# EAGLE board LED_Switch_Circuit (EAGLE 8.1.0)
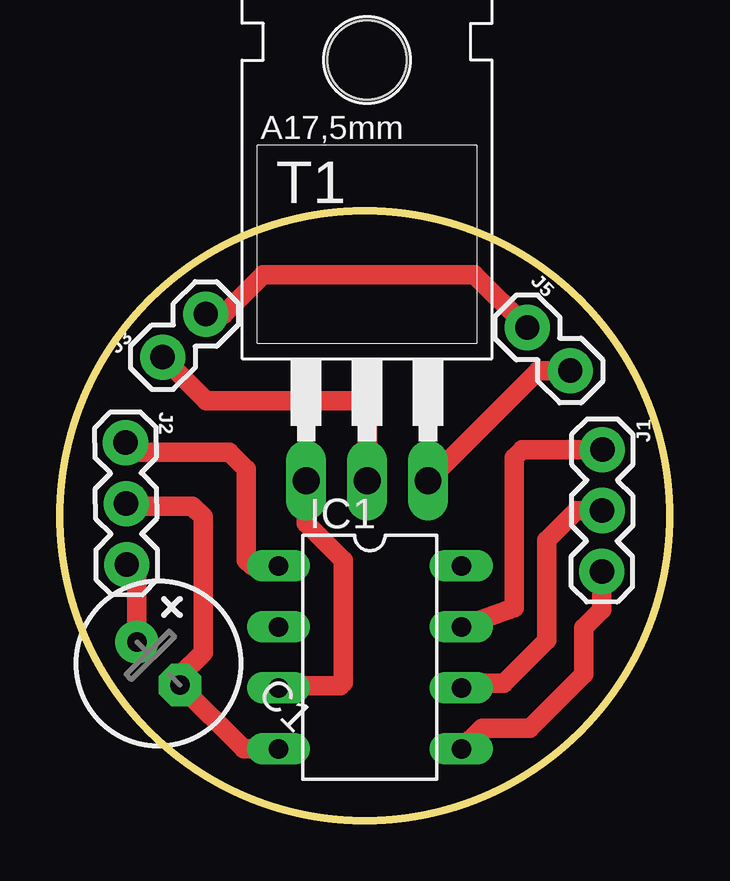
[diagram p0: board, top side]
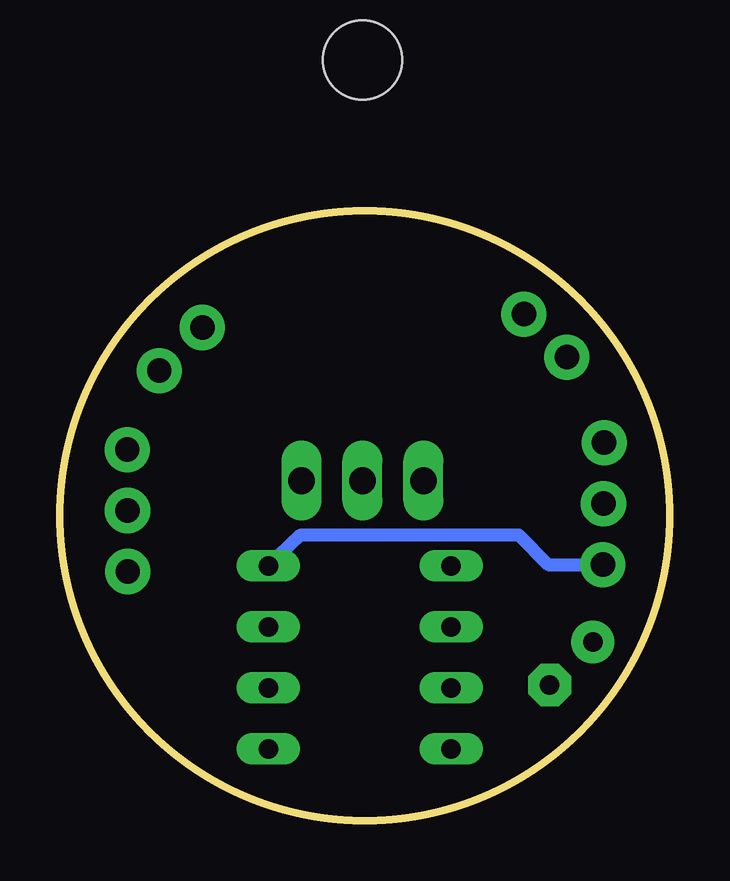
[diagram p1: board, bottom side, seen from below]

Size 25.4 x 25.4 mm. Coordinates in mm from the lower left corner, seen from the top.
Outline: circle at 12.7,12.7 radius 12.7
Copper layers (1*16): Top 0.035mm / dielectric 1.5mm / Bottom 0.035mm
Design rules "default": minimum track width 10mil, minimum drill 24mil, track to track 8mil, track to pad 8mil, pad to pad 8mil, via to via 8mil, smd to smd 8mil, copper to edge 40mil, drill to drill 8mil, minimum pad ring 10mil, minimum via ring 8mil, stop-mask expansion 4mil, vias tented up to drill 0mil, thermal gap 10mil

## Footprints (pad centres in the part's own frame; a part is rotated, then mirrored left to right if it is on the bottom)
E-025X060 = drill 0.813 pad 1.778: + -1.27,0 | drill 0.813 pad 1.778 octagon: - 1.27,0
DIL08 = drill 0.813 long: 1 -3.81,-3.81; 2 -1.27,-3.81; 3 1.27,-3.81; 4 3.81,-3.81; 5 3.81,3.81; 6 1.27,3.81; 7 -1.27,3.81; 8 -3.81,3.81
1X03 = drill 1.016 pad 1.88: 1 0,0; 2 2.54,0; 3 5.08,0
1X02 = drill 1.016 pad 1.88: 1 0,0; 2 2.54,0
TO220 = drill 1.118 long: 1 -2.54,-6.35; 2 0,-6.35; 3 2.54,-6.35 | hole 3.302: 0,11.176

## Placement (x,y rotation side)
C1  [E-025X060]  4.1,6.54 315 top
IC1  TINY13-20PU  [DIL08]  12.91,6.8 270 top
J1  [1X03]  22.6,15.46 269.8 top
J2  [1X03]  2.73,15.74 270.6 top
J3  [1X02]  4.28,19.31 45 top
J5  [1X02]  19.47,20.54 315 top
T1  TIP31  [TO220]  12.8,20.51 0 top

## Library data of the parts
C1 = cap-master
IC1 = atmel; MPN: ATTINY13-20PU; OC_FARNELL: 9171550; OC_NEWARK: 96K6521
J1-J3 J5 = SparkFun-Connectors
T1 = transistor

## Nets
5V: C1.+ IC1.8 J2.3
GND: C1.- IC1.4 J2.2
N$1: J5.2 T1.3
N$2: J3.2 J5.1
N$3: J3.1 T1.2
N$4: IC1.3 T1.1
PIN10: IC1.1 J2.1
PIN11: IC1.5 J1.3
PIN12: IC1.6 J1.2
PIN13: IC1.7 J1.1

## Tracks (layer width: path | path; a pad name or v marks a point on that pad's centre or on a via)
5V
  Top 0.813: J2.3 3.2,10.24 C1.+
  Bottom 0.533: IC1.8 15.36,11.9 6.29,11.9 5.05,10.66 J2.3
GND
  Top 0.813: C1.- 7.65,2.99 IC1.4 | C1.- 5.1,5.75 | 2.75,13.13 J2.2 2.86,13.1 5.52,13.1 5.97,12.65 5.97,7 5,6.03 C1.-
N$1
  Top 0.813: T1.3 19.92,18.75 J5.2
N$2
  Top 0.813: J5.1 17.26,22.75 8.47,22.75 6.82,21.1 J3.2
N$3
  Top 0.813: J3.1 6.1,17.49 12.73,17.49 12.8,17.42 T1.2
N$4
  Top 0.813: IC1.3 9.19,5.61 11.67,5.61 11.8,5.74 11.8,10.84 10.26,12.39 T1.1
PIN10
  Top 0.813: J2.1 3.13,15.34 7.06,15.34 7.77,14.64 7.77,10.85 8.01,10.61 IC1.1
PIN11
  Top 0.813: IC1.5 17.58,3.85 19.57,3.85 21.82,6.1 21.82,8.03 22.58,8.78 J1.3
PIN12
  Top 0.813: 21.95,12.92 J1.2 21.51,12.92 20.28,11.69 20.28,7.51 18.48,5.71 16.91,5.71 IC1.6
PIN13
  Top 0.813: IC1.7 18.92,8.86 18.92,15.11 19.27,15.46 J1.1